# EAGLE board Project-TSC-PCB (EAGLE 9.7.0)
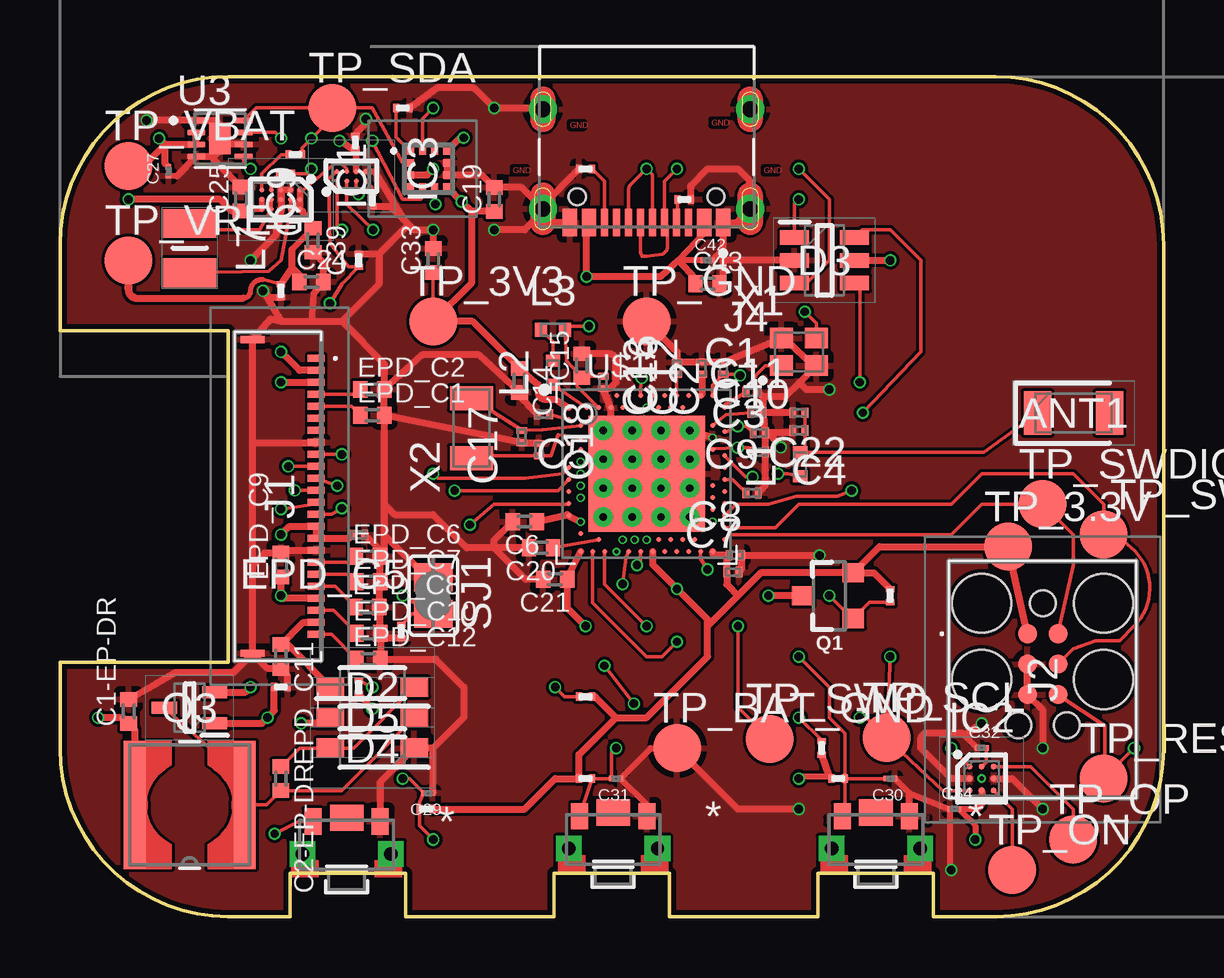
[diagram p0: board, top side]
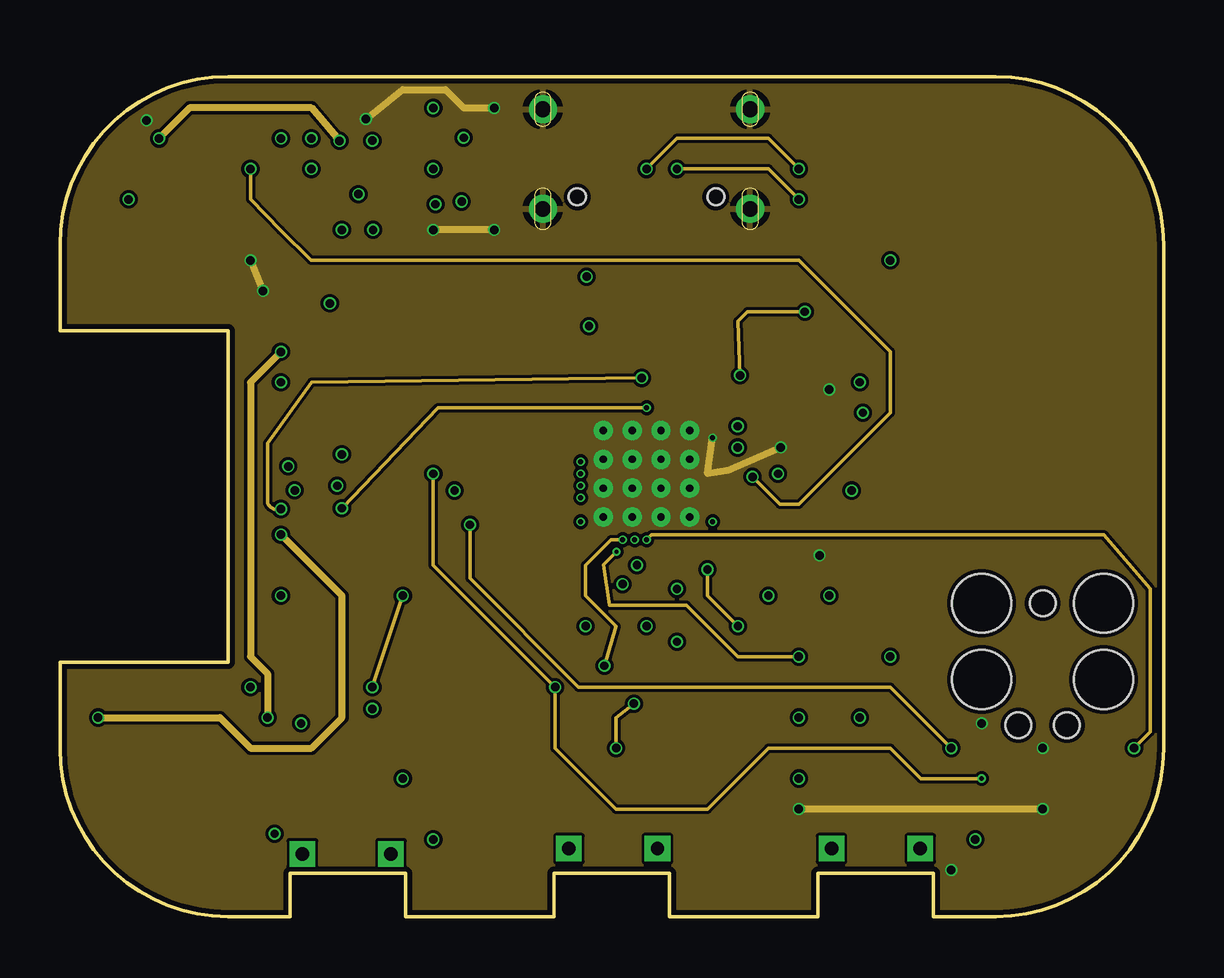
[diagram p1: board, inner layer Route2]
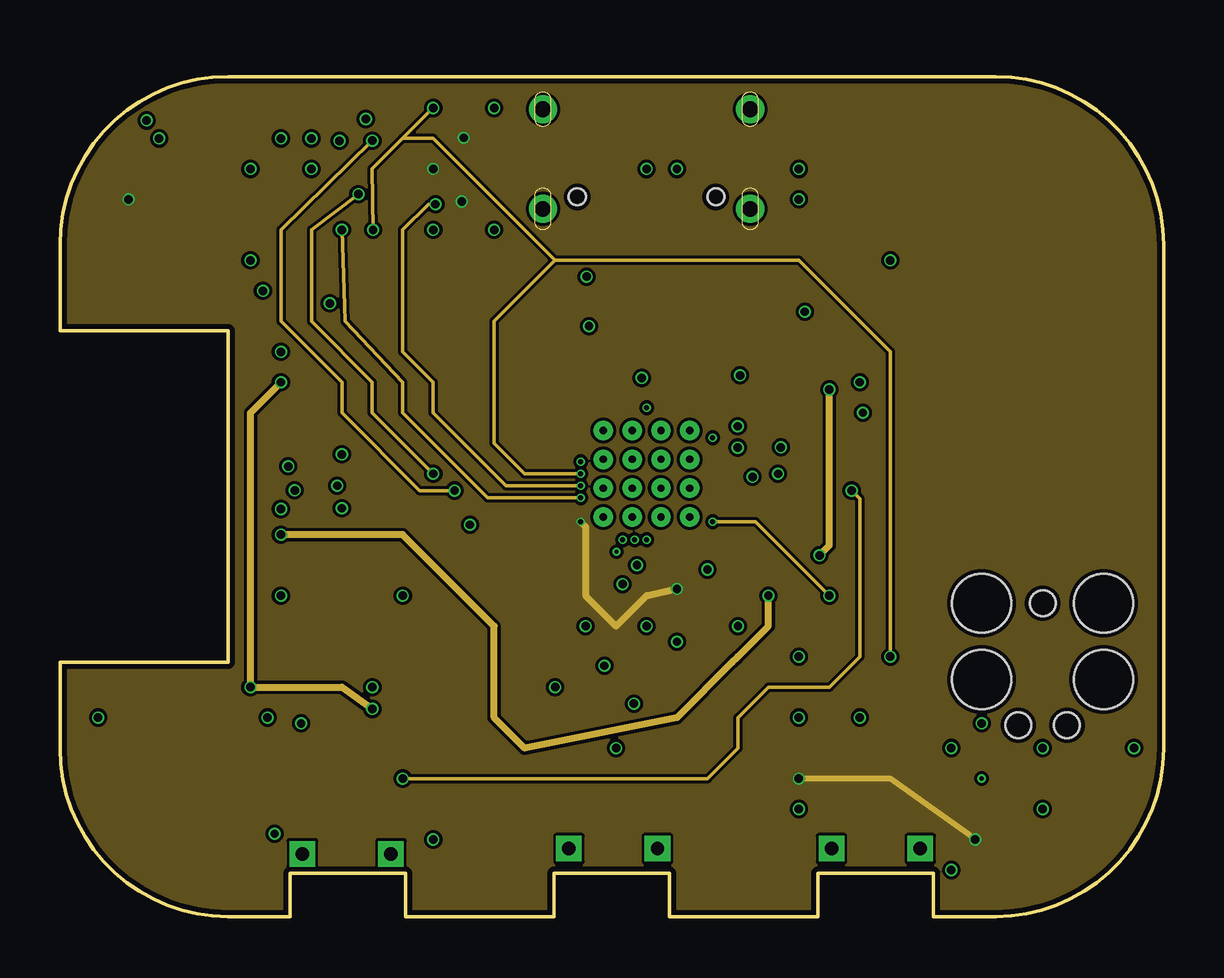
[diagram p2: board, inner layer Route15]
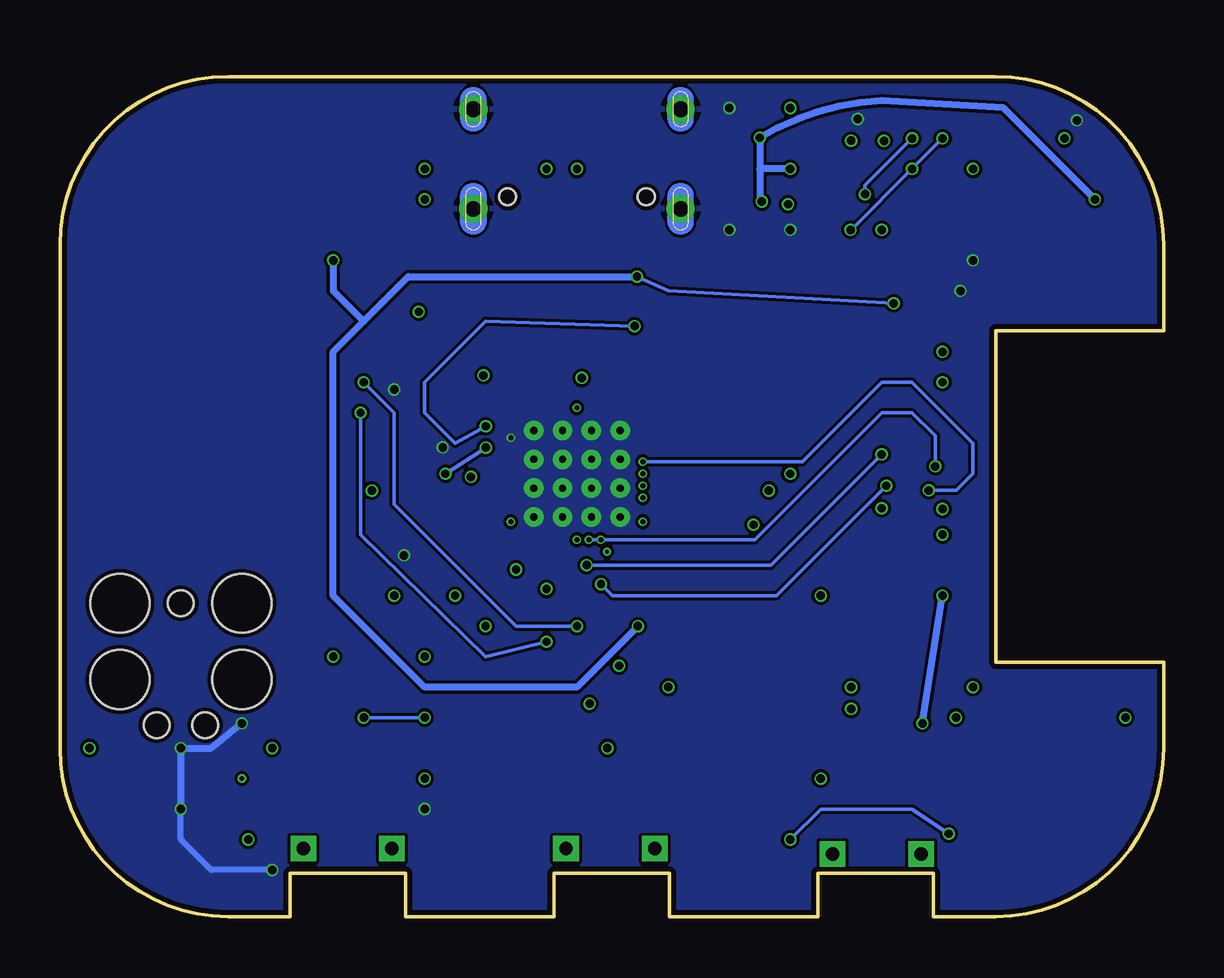
[diagram p3: board, bottom side, seen from below]

Size 46 x 35 mm. Coordinates in mm from the lower left corner, seen from the top.
Outline: 39,0 36.4,0 36.4,1.8 31.6,1.8 31.6,0 25.4,0 25.4,1.8 20.6,1.8 20.6,0 14.4,0 14.4,1.8 9.6,1.8 9.6,0 7,0 arc-90 0,7 0,10.6 7,10.6 7,24.4 0,24.4 0,28 arc-90 7,35 39,35 arc-90 46,28 46,7 arc-90 39,0
Copper layers (1+2*15+16): Top 0.035mm / dielectric 1.6mm / Route2 0.035mm / dielectric 0.15mm / Route15 0.035mm / dielectric 0.2mm / Bottom 0.035mm
Design rules "jlcpcb-2layers.dru *": minimum track width 5mil, minimum drill 0.3mm, track to track 5mil, track to pad 5mil, pad to pad 5mil, via to via 5mil, smd to smd 5mil, copper to edge 0.2mm, drill to drill 6mil, minimum pad ring 10mil, minimum via ring 3mil, stop-mask expansion 4mil, vias tented up to drill 0mil, thermal gap 10mil

## Footprints (pad centres in the part's own frame; a part is rotated, then mirrored left to right if it is on the bottom)
2450AT18B100E_ANTC3216X140N = smd 1.15 x 1.8: 1 -1.5,0; 2 1.5,0
NORDIC_NRF_3_RESC0201_L = smd 0.28 x 0.43: 1 -0.255,0; 2 0.255,0
PERFECT_0402_0402 = smd 0.6 x 0.7: 1 -0.5,0; 2 0.5,0
GRM011R60J152KE01L_1_0201 = smd 0.35 x 0.25: 1 0,0.275; 2 0,-0.275
GRM011R60J152KE01L_2_CAPC0201X13N = smd 0.22 x 0.23: 1 -0.185,0; 2 0.185,0
ESP32_C6_LIBRARY_5_SOD3716X135N = smd 1.15 x 0.8: 1 -1.75,0; 2 1.75,0
ESP32_C6_LIBRARY_3_SOT95P280X145-6N = smd 1.2 x 0.6: 1 -1.25,0.95; 2 -1.25,0; 3 -1.25,-0.95; 4 1.25,-0.95; 5 1.25,0; 6 1.25,0.95
BQ25180YBGR_BGA8C40P2X4_100X155X50 = smd 0.2 x 0.2: A1 -0.2,0.6; A2 0.2,0.6; B1 -0.2,0.2; B2 0.2,0.2; C1 -0.2,-0.2; C2 0.2,-0.2; D1 -0.2,-0.6; D2 0.2,-0.6
DRV2605YZFR_BGA9C50P3X3_144X144X62 = smd 0.25 x 0.25: A1 -0.5,0.5; A2 0,0.5; A3 0.5,0.5; B1 -0.5,0; B2 0,0; B3 0.5,0; C1 -0.5,-0.5; C2 0,-0.5; C3 0.5,-0.5
BMA423_BMA423 = smd 0.3 x 0.35: 1 -0.75,-0.775; 2 -0.25,-0.775; 3 0.25,-0.775; 4 0.75,-0.775; 7 0.75,0.775; 8 0.25,0.775; 9 -0.25,0.775; 10 -0.75,0.775 | smd 0.35 x 0.3: 5 0.775,-0.25; 6 0.775,0.25; 11 -0.775,0.25; 12 -0.775,-0.25
RT6160AWSC_BGA15C40P3X5_140X230X60 = smd 0.216 x 0.216: A1 -0.4,0.8; A2 0,0.8; A3 0.4,0.8; B1 -0.4,0.4; B2 0,0.4; B3 0.4,0.4; C1 -0.4,0; C2 0,0; C3 0.4,0; D1 -0.4,-0.4; D2 0,-0.4; D3 0.4,-0.4; E1 -0.4,-0.8; E2 0,-0.8; E3 0.4,-0.8
503480-2400_5034802400 = smd 0.3 x 0.7: 1 -5.75,1.525; 2 -5.25,1.525; 3 -4.75,1.525; 4 -4.25,1.525; 5 -3.75,1.525; 6 -3.25,1.525; 7 -2.75,1.525; 8 -2.25,1.525; 9 -1.75,1.525; 10 -1.25,1.525; 11 -0.75,1.525; 12 -0.25,1.525; 13 0.25,1.525; 14 0.75,1.525; 15 1.25,1.525; 16 1.75,1.525; 17 2.25,1.525; 18 2.75,1.525; 19 3.25,1.525; 20 3.75,1.525; 21 4.25,1.525; 22 4.75,1.525; 23 5.25,1.525; 24 5.75,1.525 | smd 0.3 x 1: MP1 -6.54,-1.125; MP2 6.54,-1.125
TC2030-IDC_TC2030IDC = smd 0.783 x 0.783: 1 -0.953,-0.635; 2 -0.953,0.635; 3 0.317,-0.635; 4 0.317,0.635; 5 1.588,-0.635; 6 1.588,0.635 | hole 2.451: -2.223,-2.54; -2.223,2.54; 0.952,-2.54; 0.952,2.54 | hole 1.067: -2.223,0; 2.857,-1.016; 2.857,1.016
KH-TYPE-C-16P_KINGHELM_KH-TYPE-C-16P = smd 0.6 x 1.15: A1_B12 -3.2,4.725; A4_B9 -2.4,4.725; A9_B4 2.4,4.725; A12_B1 3.2,4.725 | smd 0.3 x 1.15: A5 -1.25,4.725; A6 -0.25,4.725; A7 0.25,4.725; A8 1.25,4.725; B5 1.75,4.725; B6 0.75,4.725; B7 -0.75,4.725; B8 -1.75,4.725 | drill 0.65 pad 1.05: SH1 -4.32,0; SH2 4.32,0; SH3 -4.32,4.15; SH4 4.32,4.15 | hole 0.7: -2.89,3.65; 2.89,3.65
NORDIC_NRF_2_RESC0402_L = smd 0.5 x 0.6: 1 -0.5,0; 2 0.5,0
ESP32_C6_LIBRARY_2_IND_4828-WE-TPC_WRE = smd 0.9 x 5.3: 1 -2.286,0; 2 2.286,0
MLP2016SR47MT0S1_INDC2016X100N = smd 1.2 x 2.2: 1 -1.028,0; 2 1.028,0
ESP32_C6_LIBRARY_4_ESP32_C6_LIBRARY_4_ESP32_C6_LIBRARY_4_ESP32_C6_LIBRARY_4_ESP32_WROVER_SPARKFUN-DISCRETESEMI_SOT23-3 = smd 0.8 x 0.9: 1 -0.95,-1; 2 0.95,-1; 3 0,1.1
ESP32_C6_LIBRARY_6_SOT65P210X110-3N = smd 1.05 x 0.5: 1 -1.05,0.65; 2 -1.05,-0.65; 3 1.05,0
CPF0201D7K68C1_0201 = smd 0.35 x 0.25: 1 0,0.275; 2 0,-0.275
ESP32_C6_LIBRARY_7_JUMPER_SJ = smd 1.168 x 1.6: 1 -0.762,0; 2 0.762,0
2025-10-22_07-23-44_LIBRARY_SW_EVP-AKE31A_PAN = smd 0.711 x 1.092: 1 -1.4,-0.972; 2 1.4,-0.972 | drill 0.559 pad 0.914 square: 3 -1.848,0.381; 4 1.848,0.381 | smd 1.397 x 1.092: 5 0,-1.124
HECTOR_WATCH_1_TP20R = smd 2 x 2: TP 0,0
ESP32_C6_LIBRARY_SON50P200X200X80-9N = smd 0.76 x 0.27: 1 -0.985,0.75; 2 -0.985,0.25; 3 -0.985,-0.25; 4 -0.985,-0.75; 5 0.985,-0.75; 6 0.985,-0.25; 7 0.985,0.25; 8 0.985,0.75 | smd 0.9 x 1.3: 9 0,0
NORDIC_NRF_4_AQFN50P700X700X85_HS-74N = smd 4.85 x 4.85: P$74 0,0 | drill 0.3 pad 0.6: P$75 -1.8,1.8; P$76 -0.6,1.8; P$77 0.6,1.8; P$78 1.8,1.8; P$79 -1.8,0.6; P$80 -0.6,0.6; P$81 0.6,0.6; P$82 1.8,0.6; P$83 -1.8,-0.6; P$84 -0.6,-0.6; P$85 0.6,-0.6; P$86 1.8,-0.6; P$87 -1.8,-1.8; P$88 -0.6,-1.8; P$89 0.6,-1.8; P$90 1.8,-1.8 | smd 0.2 x 0.2: P$A8 -1.25,3.25; P$A10 -0.75,3.25; P$A12 -0.25,3.25; P$A14 0.25,3.25; P$A16 0.75,3.25; P$A18 1.25,3.25; P$A20 1.75,3.25; P$A22 2.25,3.25; P$A23 2.75,3.25; P$AA24 3.25,-2.25; P$AB2 -2.75,-2.5; P$AC5 -2,-2.75; P$AC9 -1,-2.75; P$AC11 -0.5,-2.75; P$AC13 0,-2.75; P$AC15 0.5,-2.75; P$AC17 1,-2.75; P$AC19 1.5,-2.75; P$AC21 2,-2.75; P$AC24 3.25,-2.75; P$AD2 -2.75,-3.25; P$AD4 -2.25,-3.25; P$AD6 -1.75,-3.25; P$AD8 -1.25,-3.25; P$AD10 -0.75,-3.25; P$AD12 -0.25,-3.25; P$AD14 0.25,-3.25; P$AD16 0.75,-3.25; P$AD18 1.25,-3.25; P$AD20 1.75,-3.25; P$AD22 2.25,-3.25; P$AD23 2.75,-3.25; P$B1 -3.25,2.75; P$B3 -2.5,2.75; P$B5 -2,2.75; P$B7 -1.5,2.75; P$B9 -1,2.75; P$B11 -0.5,2.75; P$B13 0,2.75; P$B15 0.5,2.75; P$B17 1,2.75; P$B19 1.5,2.75; P$B24 3.25,2.75; P$C1 -3.25,2.25; P$D2 -2.75,2; P$D23 2.75,2; P$E24 3.25,1.75; P$F2 -2.75,1.5; P$F23 2.75,1.5; P$G1 -3.25,1.25; P$H2 -2.75,1; P$H23 2.75,1; P$J1 -3.25,0.75; P$J24 3.25,0.75; P$K2 -2.75,0.5; P$L1 -3.25,0.25; P$L24 3.25,0.25; P$M2 -2.75,0; P$N1 -3.25,-0.25; P$N24 3.25,-0.25; P$P2 -2.75,-0.5; P$P23 2.75,-0.5; P$R1 -3.25,-0.75; P$R24 3.25,-0.75; P$T2 -2.75,-1; P$T23 2.75,-1; P$U1 -3.25,-1.25; P$U24 3.25,-1.25; P$V23 2.75,-1.5; P$W1 -3.25,-1.75; P$W24 3.25,-1.75; P$Y2 -2.75,-2; P$Y23 2.75,-2
NORDIC_NRF_BT-XTAL_2016_N = smd 0.95 x 0.85: 1 -0.725,-0.575; 2 0.725,-0.575; 3 0.725,0.575; 4 -0.725,0.575
NORDIC_NRF_1_XTAL_3215_N = smd 1 x 1.8: 1 -1.25,0; 2 1.25,0

## Placement (x,y rotation side)
ANT1  2450AT18B100E_2450AT18B100E  [2450AT18B100E_ANTC3216X140N]  42.25,20.98 0 top
C1  12pF  [NORDIC_NRF_3_RESC0201_L]  28.85,21.85 0 top
C1-EP-DR  10uF  [PERFECT_0402_0402]  2.86,8.55 90 top
C2  12pF  [NORDIC_NRF_3_RESC0201_L]  27.65,22.85 90 top
C2-EP-DR  4.7uF/25V  [PERFECT_0402_0402]  9.21,5.75 270 top
C3  1pF  [NORDIC_NRF_3_RESC0201_L]  29.15,19.35 0 top
C4  1pF  [NORDIC_NRF_3_RESC0201_L]  30.8,20.25 180 top
C5  100nF  [NORDIC_NRF_3_RESC0201_L]  20.15,20.93 180 top
C6  4.7µF  [PERFECT_0402_0402]  19.37,16.45 180 top
C7  100nF  [NORDIC_NRF_3_RESC0201_L]  28.05,14.35 0 top
C8  100nF  [NORDIC_NRF_3_RESC0201_L]  28.15,15.05 0 top
C9  820pF  [NORDIC_NRF_3_RESC0201_L]  28.85,17.65 0 top
C10  N.C.  [NORDIC_NRF_3_RESC0201_L]  29.15,20.15 0 top
C11  100pF  [NORDIC_NRF_3_RESC0201_L]  29.05,21 0 top
C12  100nF  [NORDIC_NRF_3_RESC0201_L]  26.75,22.85 90 top
C13  N.C.  [NORDIC_NRF_3_RESC0201_L]  25.72,22.85 90 top
C14  4.7µF  [PERFECT_0402_0402]  19.15,22.34 270 top
C15  1.0µF  [PERFECT_0402_0402]  21.75,22.95 90 top
C16  47nF  [NORDIC_NRF_3_RESC0201_L]  22.64,22.26 270 top
C17  12pF  [NORDIC_NRF_3_RESC0201_L]  19.25,20 90 top
C18  12pF  [NORDIC_NRF_3_RESC0201_L]  19.97,19.45 270 top
C19  100nF  [PERFECT_0402_0402]  18.1,29.88 90 top
C20  4.7µF  [PERFECT_0402_0402]  20.05,15.36 180 top
C21  4.7µF  [PERFECT_0402_0402]  20.64,14.05 180 top
C22  N.C.  [NORDIC_NRF_3_RESC0201_L]  30.8,20.99 180 top
C23  0.1uF  [GRM011R60J152KE01L_1_0201]  9.21,26.07 180 top
C24  10uF  [PERFECT_0402_0402]  10.48,26.44 0 top
C25  22uF  [PERFECT_0402_0402]  7.55,29.89 90 top
C27  0.1uF  [GRM011R60J152KE01L_2_CAPC0201X13N]  4.53,31.05 90 top
C29  1uF  [GRM011R60J152KE01L_2_CAPC0201X13N]  15.35,5.15 180 top
C30  1uF  [GRM011R60J152KE01L_2_CAPC0201X13N]  34.61,5.75 180 top
C31  1uF  [GRM011R60J152KE01L_2_CAPC0201X13N]  23.18,5.75 180 top
C32  1uF  [GRM011R60J152KE01L_2_CAPC0201X13N]  38.42,7.02 0 top
C33  22uF  [PERFECT_0402_0402]  15.56,27.34 90 top
C34  0.1uF  [GRM011R60J152KE01L_2_CAPC0201X13N]  37.28,4.48 0 top
C37  1uF  [GRM011R60J152KE01L_1_0201]  12.32,32.25 0 top
C38  1uF  [GRM011R60J152KE01L_1_0201]  12.45,27.34 0 top
C39  10uF  [PERFECT_0402_0402]  10.55,28.18 270 top
C42  0.1uF  [GRM011R60J152KE01L_2_CAPC0201X13N]  26.99,27.34 0 top
C43  4.7uF  [PERFECT_0402_0402]  26.99,26.37 0 top
D2  MBR0530  [ESP32_C6_LIBRARY_5_SOD3716X135N]  13.02,9.56 180 top
D3  ESP32_C6_LIBRARY_3_USBLC6-2SC6Y  [ESP32_C6_LIBRARY_3_SOT95P280X145-6N]  31.87,27.34 0 top
D4  MBR0530  [ESP32_C6_LIBRARY_5_SOD3716X135N]  13.02,7.02 180 top
D5  MBR0530  [ESP32_C6_LIBRARY_5_SOD3716X135N]  13.02,8.29 0 top
EPD_C1  1uF/50V  [PERFECT_0402_0402]  13.02,20.89 0 top
EPD_C2  1uF/50V  [PERFECT_0402_0402]  13.02,21.96 0 top
EPD_C5  0.1uF/50V  [NORDIC_NRF_3_RESC0201_L]  12.45,15.91 180 top
EPD_C6  1uF/50V  [PERFECT_0402_0402]  12.84,15.01 0 top
EPD_C7  1uF/50V  [PERFECT_0402_0402]  12.85,13.95 0 top
EPD_C8  1uF/50V  [PERFECT_0402_0402]  12.82,12.89 0 top
EPD_C9  1uF/50V  [PERFECT_0402_0402]  9.21,14.64 90 top
EPD_C10  1uF/50V  [PERFECT_0402_0402]  12.86,11.8 0 top
EPD_C11  1uF/50V  [PERFECT_0402_0402]  9.21,10.83 270 top
EPD_C12  1uF/50V  [PERFECT_0402_0402]  12.85,10.73 0 top
IC1  BQ25180YBGR_BQ25180YBGR  [BQ25180YBGR_BGA8C40P2X4_100X155X50]  12.15,30.85 90 top
IC2  DRV2605YZFR_DRV2605YZFR  [DRV2605YZFR_BGA9C50P3X3_144X144X62]  38.42,5.75 0 top
IC3  BMA423_BMA423  [BMA423_BMA423]  15.36,31.15 270 top
IC9  RT6160AWSC_RT6160AWSC  [RT6160AWSC_BGA15C40P3X5_140X230X60]  9.21,29.88 270 top
J1  503480-2400_503480-2400  [503480-2400_5034802400]  9.15,17.51 270 top
J2  TC2030-IDC_TC2030-IDC  [TC2030-IDC_TC2030IDC]  40.96,10.83 270 top
J4  KH-TYPE-C-16P_KH-TYPE-C-16P  [KH-TYPE-C-16P_KINGHELM_KH-TYPE-C-16P]  24.45,33.64 180 top
L1  3.9nH  [NORDIC_NRF_2_RESC0402_L]  30.85,18.85 90 top
L2  3.9nH  [NORDIC_NRF_2_RESC0402_L]  20.55,22.65 90 top
L3  3.9nH  [NORDIC_NRF_2_RESC0402_L]  20.55,24.45 0 top
L5  68uH  [ESP32_C6_LIBRARY_2_IND_4828-WE-TPC_WRE]  5.4,4.65 180 top
L7  MLP2016SR47MT0S1_FTC252012SR47MBCA  [MLP2016SR47MT0S1_INDC2016X100N]  5.4,27.85 90 top
Q1  20V/4.2A/52mΩ/1.4W  [ESP32_C6_LIBRARY_4_ESP32_C6_LIBRARY_4_ESP32_C6_LIBRARY_4_ESP32_C6_LIBRARY_4_ESP32_WROVER_SPARKFUN-DISCRETESEMI_SOT23-3]  32.07,13.37 90 top
Q3  ESP32_C6_LIBRARY_6_SI1308EDL-T1-GE3  [ESP32_C6_LIBRARY_6_SOT65P210X110-3N]  5.4,8.7 180 top
R1_EP_DR  0.47  [CPF0201D7K68C1_0201]  12.45,9.56 0 top
R1_USB  5K1  [CPF0201D7K68C1_0201]  26.02,29.88 270 top
R2  0  [CPF0201D7K68C1_0201]  9.81,31.75 270 top
R2_EP_DR  10K  [CPF0201D7K68C1_0201]  9.21,9.56 270 top
R2_USB  5K1  [CPF0201D7K68C1_0201]  21.91,31.15 270 top
R3  0  [CPF0201D7K68C1_0201]  14.29,33.69 270 top
R4  0  [CPF0201D7K68C1_0201]  9.41,30.95 270 top
R5  10K  [CPF0201D7K68C1_0201]  32.44,5.75 270 top
R7  10K  [CPF0201D7K68C1_0201]  15.26,4.48 90 top
R8  10K  [CPF0201D7K68C1_0201]  21.91,5.75 270 top
R9  10K  [CPF0201D7K68C1_0201]  13.02,29.88 180 top
R17  3K3  [CPF0201D7K68C1_0201]  31.75,7.02 180 top
R18  3K3  [CPF0201D7K68C1_0201]  21.91,9.16 270 top
R_PWR_EPD  10K  [CPF0201D7K68C1_0201]  34.61,13.37 180 top
R_TYPE_SEL  2.2  [CPF0201D7K68C1_0201]  14.23,11.88 180 top
SJ1  0  [ESP32_C6_LIBRARY_7_JUMPER_SJ]  15.56,13.37 270 top
SW_DN  2025-10-22_07-23-44_LIBRARY_EVP-AKE31ASW_EVP-AKE31A_PAN  [2025-10-22_07-23-44_LIBRARY_SW_EVP-AKE31A_PAN]  11.95,2.99 180 top
SW_ENT  2025-10-22_07-23-44_LIBRARY_EVP-AKE31ASW_EVP-AKE31A_PAN  [2025-10-22_07-23-44_LIBRARY_SW_EVP-AKE31A_PAN]  23.06,3.21 180 top
SW_UP  2025-10-22_07-23-44_LIBRARY_EVP-AKE31ASW_EVP-AKE31A_PAN  [2025-10-22_07-23-44_LIBRARY_SW_EVP-AKE31A_PAN]  34.01,3.21 180 top
TP_3.3V  HECTOR_WATCH_1_TPTP20R  [HECTOR_WATCH_1_TP20R]  39.52,15.41 0 top
TP_3V3  HECTOR_WATCH_1_TPTP20R  [HECTOR_WATCH_1_TP20R]  15.56,24.8 0 top
TP_BAT_GND  HECTOR_WATCH_1_TPTP20R  [HECTOR_WATCH_1_TP20R]  25.72,7.02 0 top
TP_GND  HECTOR_WATCH_1_TPTP20R  [HECTOR_WATCH_1_TP20R]  24.45,24.8 0 top
TP_ON  HECTOR_WATCH_1_TPTP20R  [HECTOR_WATCH_1_TP20R]  39.69,1.94 0 top
TP_OP  HECTOR_WATCH_1_TPTP20R  [HECTOR_WATCH_1_TP20R]  42.23,3.21 0 top
TP_RESET  HECTOR_WATCH_1_TPTP20R  [HECTOR_WATCH_1_TP20R]  43.5,5.75 0 top
TP_SCL  HECTOR_WATCH_1_TPTP20R  [HECTOR_WATCH_1_TP20R]  34.45,7.45 0 top
TP_SDA  HECTOR_WATCH_1_TPTP20R  [HECTOR_WATCH_1_TP20R]  11.35,33.69 0 top
TP_SWDCLK  HECTOR_WATCH_1_TPTP20R  [HECTOR_WATCH_1_TP20R]  43.5,15.91 0 top
TP_SWDIO  HECTOR_WATCH_1_TPTP20R  [HECTOR_WATCH_1_TP20R]  40.96,17.18 0 top
TP_SWO  HECTOR_WATCH_1_TPTP20R  [HECTOR_WATCH_1_TP20R]  29.59,7.4 0 top
TP_VBAT  HECTOR_WATCH_1_TPTP20R  [HECTOR_WATCH_1_TP20R]  2.86,31.28 0 top
TP_VREG  HECTOR_WATCH_1_TPTP20R  [HECTOR_WATCH_1_TP20R]  2.86,27.34 0 top
U3  ESP32_C6_LIBRARY_MAX17048G+T10  [ESP32_C6_LIBRARY_SON50P200X200X80-9N]  6.67,32.42 0 top
U$1  NORDIC_NRF_4_NRF52840_QF  [NORDIC_NRF_4_AQFN50P700X700X85_HS-74N]  24.45,18.45 0 top
X1  32MHz  [NORDIC_NRF_BT-XTAL_2016_N]  30.8,23.53 0 top
X2  32.768kHz  [NORDIC_NRF_1_XTAL_3215_N]  17.15,20.35 90 top

## Library data of the parts
ANT1 = InkTime_v5; ARROW_PART_NUMBER: 2450AT18B100E; ARROW_PRICE-STOCK: https://www.arrow.com/en/products/2450at18b100e/johanson-dielectrics?utm_currency=USD&region=nac; DESCRIPTION: Antennas 2.45GHz ANTENNA; HEIGHT: 1.4mm; MANUFACTURER_NAME: JOHANSON TECHNOLOGY; MANUFACTURER_PART_NUMBER: 2450AT18B100E; MOUSER_PART_NUMBER: 609-2450AT18B100E; MOUSER_PRICE-STOCK: https://www.mouser.co.uk/ProductDetail/Johanson-Technology/2450AT18B100E?qs=yCnrNFeXz%252Bh5MFsFIXGZGA%3D%3D
C1 C1-EP-DR C2 C2-EP-DR C3-C25 C33 C37-C39 C43 EPD_C1 EPD_C2 EPD_C5-EPD_C12 L1-L3 R1_EP_DR R1_USB R2 R2_EP_DR R2_USB R3-R5 R7-R9 R17 R18 R_PWR_EPD R_TYPE_SEL SJ1 TP_3.3V TP_3V3 TP_BAT_GND TP_GND TP_ON TP_OP TP_RESET TP_SCL TP_SDA TP_SWDCLK TP_SWDIO TP_SWO TP_VBAT TP_VREG U$1 X1 X2 = InkTime_v5
C27 C29-C32 C34 C42 = InkTime_v5; AVAILABILITY: In Stock; CHECK_PRICES: https://www.snapeda.com/parts/GRM011R60J152KE01L/Murata/view-part/?ref=eda; DESCRIPTION: SMD Capacitor X5R(EIA) with Capacitance: 1500pF Tol. 10%. Rated Voltage: 6.3Vdc; MF: Murata; MP: GRM011R60J152KE01L; PACKAGE: 0201 Murata; PRICE: None; SNAPEDA_LINK: https://www.snapeda.com/parts/GRM011R60J152KE01L/Murata/view-part/?ref=snap
D2 D4 D5 = InkTime_v5; AVAILABILITY: In Stock; CHECK_PRICES: https://www.snapeda.com/parts/MBR0530/Onsemi/view-part/?ref=eda; DESCRIPTION: Diode Schottky 30 V 500mA Surface Mount SOD-123; MF: ON Semiconductor; MP: MBR0530; PACKAGE: SOD-123-2 ON Semiconductor; PRICE: None; PURCHASE-URL: https://www.snapeda.com/api/url_track_click_mouser/?unipart_id=179458&manufacturer=ON Semiconductor&part_name=MBR0530&search_term=None; SNAPEDA_LINK: https://www.snapeda.com/parts/MBR0530/Onsemi/view-part/?ref=snap
D3 = InkTime_v5; AVAILABILITY: In Stock; CHECK_PRICES: https://www.snapeda.com/parts/USBLC6-2SC6Y/STMicroelectronics/view-part/?ref=eda; DESCRIPTION: 17V Clamp 5A (8/20µs) Ipp Tvs Diode Surface Mount SOT-23-6; MF: STMicroelectronics; MP: USBLC6-2SC6Y; PACKAGE: SOT-23-6 STMicroelectronics; PRICE: None; SNAPEDA_LINK: https://www.snapeda.com/parts/USBLC6-2SC6Y/STMicroelectronics/view-part/?ref=snap
IC1 = InkTime_v5; ARROW_PART_NUMBER: BQ25180YBGR; ARROW_PRICE-STOCK: https://www.arrow.com/en/products/bq25180ybgr/texas-instruments?utm_currency=USD&region=nac; DESCRIPTION: Charger IC Lithium Ion/Polymer, Lithium Iron Phosphate 8-DSBGA (1.6x1.1); HEIGHT: 0.5mm; MANUFACTURER_NAME: Texas Instruments; MANUFACTURER_PART_NUMBER: BQ25180YBGR; MOUSER_PART_NUMBER: 595-BQ25180YBGR; MOUSER_PRICE-STOCK: https://www.mouser.co.uk/ProductDetail/Texas-Instruments/BQ25180YBGR?qs=doiCPypUmgEWjAK%252BJAX6Tw%3D%3D
IC2 = InkTime_v5; ARROW_PART_NUMBER: DRV2605YZFR; ARROW_PRICE-STOCK: https://www.arrow.com/en/products/drv2605yzfr/texas-instruments?region=nac; DESCRIPTION: Haptic Driver for ERM/LRA with Built-In Library and Smart Loop Architecture; HEIGHT: 0.625mm; MANUFACTURER_NAME: Texas Instruments; MANUFACTURER_PART_NUMBER: DRV2605YZFR
IC3 = InkTime_v5; ARROW_PART_NUMBER: BMA423; ARROW_PRICE-STOCK: https://www.arrow.com/en/products/bma423/bosch; DESCRIPTION: Accelerometers Triaxial low-g 12bit Acceleration Sensor; HEIGHT: 1mm; MANUFACTURER_NAME: BOSCH; MANUFACTURER_PART_NUMBER: BMA423; MOUSER_PART_NUMBER: 262-BMA423; MOUSER_PRICE-STOCK: https://www.mouser.co.uk/ProductDetail/Bosch-Sensortec/BMA423?qs=HXFqYaX1Q2xC%252BSgeGoX3mg%3D%3D
IC9 = InkTime_v5; DESCRIPTION: Buck-Boost Regulator Positive Output Step-Up/Step-Down I2C DC-DC Controller IC 15-WL-CSP (BSC) (1.4x2.3); HEIGHT: 0.6mm; MANUFACTURER_NAME: RICHTEK; MANUFACTURER_PART_NUMBER: RT6160AWSC; MOUSER_PART_NUMBER: 835-RT6160AWSC; MOUSER_PRICE-STOCK: https://www.mouser.co.uk/ProductDetail/Richtek/RT6160AWSC?qs=amGC7iS6iy%2FLd9PSoixZXQ%3D%3D
J1 = InkTime_v5; DESCRIPTION: FFC & FPC Connectors 0.5mm FPC RA SMT Dual Contact 24Ckt; HEIGHT: 1.87mm; MANUFACTURER_NAME: Molex; MANUFACTURER_PART_NUMBER: 503480-2400; MOUSER_PART_NUMBER: 538-503480-2400; MOUSER_PRICE-STOCK: https://www.mouser.co.uk/ProductDetail/Molex/503480-2400?qs=OAhjpuo3Vu7efIoxFh9AOw%3D%3D
J2 = InkTime_v5; DESCRIPTION: CABLE ADAPTER 6 POS; HEIGHT: 19mm; MANUFACTURER_NAME: Tag Connect; MANUFACTURER_PART_NUMBER: TC2030-IDC
J4 = InkTime_v5; AVAILABILITY: Not in stock; CHECK_PRICES: https://www.snapeda.com/parts/KH-TYPE-C-16P/Kinghelm/view-part/?ref=eda; MF: kinghelm; MP: KH-TYPE-C-16P; PACKAGE: None; PRICE: None; SNAPEDA_LINK: https://www.snapeda.com/parts/KH-TYPE-C-16P/Kinghelm/view-part/?ref=snap
L5 = InkTime_v5; COPYRIGHT: Copyright (C) 2024 Ultra Librarian. All rights reserved.; MANUFACTURER_PART_NUMBER: 744043680; MFR_NAME: Wurth Electronics
L7 = InkTime_v5; DESCRIPTION: SMD / SMT Inductors (Coils), L=0.47?H, L x W x T :; HEIGHT: 1mm; JLCPCB: https://jlcpcb.com/partdetail/6763488-FTC252012SR47MBCA/C5832368; MANUFACTURER_NAME: TDK; MANUFACTURER_PART_NUMBER: FTC252012SR47MBCA
Q1 = InkTime_v5; PROD_ID: TRAN-14388
Q3 = InkTime_v5; AVAILABILITY: In Stock; CHECK_PRICES: https://www.snapeda.com/parts/SI1308EDL-T1-GE3/Vishay+Siliconix/view-part/?ref=eda; DESCRIPTION: Si1308EDL-T1-GE3 N-channel MOSFET Transistor, 1.5 A, 30 V, 3-Pin SC-70 | Siliconix / Vishay SI1308EDL-T1-GE3; MF: Vishay Siliconix; MP: SI1308EDL-T1-GE3; PACKAGE: SOT-323 Vishay Semiconductor; PRICE: None; PURCHASE-URL: https://www.snapeda.com/api/url_track_click_mouser/?unipart_id=274603&manufacturer=Vishay Siliconix&part_name=SI1308EDL-T1-GE3&search_term=None; SNAPEDA_LINK: https://www.snapeda.com/parts/SI1308EDL-T1-GE3/Vishay+Siliconix/view-part/?ref=snap
SW_DN SW_ENT SW_UP = InkTime_v5; COPYRIGHT: Copyright (C) 2025 Ultra Librarian. All rights reserved.; DIGI-KEY_PART_NUMBER_1: P123437TR-ND; DIGI-KEY_PART_NUMBER_2: P123437CT-ND; DIGI-KEY_PART_NUMBER_3: P123437DKR-ND; MANUFACTURER_NAME: Panasonic; MANUFACTURER_PART_NUMBER: EVP-AKE31A
U3 = InkTime_v5; AVAILABILITY: In Stock; CHECK_PRICES: https://www.snapeda.com/parts/MAX17048G+T10/Analog+Devices/view-part/?ref=eda; DESCRIPTION: 3µA 1-Cell/2-Cell Fuel Gauge with ModelGauge; MF: Analog Devices; MP: MAX17048G+T10; PACKAGE: TDFN-8 Maxim; PRICE: None; PURCHASE-URL: https://www.snapeda.com/api/url_track_click_mouser/?unipart_id=329239&manufacturer=Analog Devices&part_name=MAX17048G+T10&search_term=None; SNAPEDA_LINK: https://www.snapeda.com/parts/MAX17048G+T10/Analog+Devices/view-part/?ref=snap

## Nets
3V3: C6.1 C7.1 C8.1 C14.1 C19.1 C25.1 C33.1 C34.2 IC2.C2 IC3.3 IC3.7 IC3.10 IC9.E2 IC9.E3 J2.1 Q1.2 R5.2 R7.2 R8.2 R17.1 R18.1 R_PWR_EPD.2 TP_3.3V.TP TP_3V3.TP U$1.P$AD14 U$1.P$AD23 U$1.P$B1 U$1.P$W1 U$1.P$Y2
3V3/2.4A: C12.1 U$1.P$A22
ALERT: U3.5 U$1.P$J24
D+: D3.4 U$1.P$AD6
D-: D3.6 U$1.P$AD4
DEC1: C5.1 U$1.P$C1
DEC3: C11.1 U$1.P$D23
DEC4_6: C10.1 C15.1 C16.1 L3.2 U$1.P$B5 U$1.P$E24
DN: D3.1 J4.A7 J4.B7
DP: D3.3 J4.A6 J4.B6
EPD_3V3: C1-EP-DR.1 EPD_C5.2 J1.15 J1.16 L5.2 Q1.3
EPD_BUSY: J1.9 U$1.P$AD12
EPD_CS: J1.12 U$1.P$K2
EPD_DC: J1.11 U$1.P$AD10
EPD_RST: J1.10 U$1.P$AC11
GDR: J1.2 Q3.1 R2_EP_DR.2
GND: C1-EP-DR.2 C1.2 C2.2 C3.2 C4.2 C5.2 C6.2 C7.2 C8.2 C9.2 C10.2 C11.2 C12.2 C13.2 C14.2 C15.2 C16.2 C17.1 C18.1 C19.2 C20.2 C21.2 C22.2 C23.1 C24.2 C25.2 C27.1 C29.1 C30.1 C31.1 C32.1 C33.2 C34.1 C37.1 C38.1 C39.2 C42.2 C43.2 D3.2 D4.1 EPD_C1.2 EPD_C2.2 EPD_C5.1 EPD_C6.2 EPD_C7.2 EPD_C8.2 EPD_C9.2 EPD_C10.2 EPD_C11.2 EPD_C12.2 IC1.D2 IC2.B1 IC2.B3 IC3.8 IC3.9 IC9.B1 IC9.C1 IC9.C2 IC9.C3 J1.8 J1.17 J1.MP1 J1.MP2 J2.3 J2.5 J4.A1_B12 J4.A12_B1 J4.SH1 J4.SH2 J4.SH3 J4.SH4 R1_USB.1 R2_EP_DR.1 R2_USB.2 R3.1 R9.1 R_TYPE_SEL.1 SJ1.1 SW_DN.1 SW_ENT.1 SW_UP.1 TP_BAT_GND.TP TP_GND.TP U3.1 U3.4 U3.6 U3.9 U$1.P$74 U$1.P$75 U$1.P$76 U$1.P$77 U$1.P$78 U$1.P$79 U$1.P$80 U$1.P$81 U$1.P$82 U$1.P$83 U$1.P$84 U$1.P$85 U$1.P$86 U$1.P$87 U$1.P$88 U$1.P$89 U$1.P$90 U$1.P$B7 U$1.P$F23 X1.2 X1.4
HAPTIC_EN: IC2.A1 U$1.P$U1
IMU_INT1: IC3.5 U$1.P$N1
IMU_INT2: IC3.6 U$1.P$P2
LX1: IC9.B2 IC9.B3 L7.1
LX2: IC9.D2 IC9.D3 L7.2
MOSI: J1.14 U$1.P$B13
N$1: IC1.D1 R9.2
N$2: C9.1 U$1.P$N24
N$3: IC9.D1 R4.2
N$4: IC9.E1 R2.2
N$5: IC3.1 R3.2
N$6: C2-EP-DR.1 D2.1 D4.2
N$7: C3.1 L1.1 U$1.P$H23
N$9: C1.1 U$1.P$B24 X1.1
N$10: C2.1 U$1.P$A23 X1.3
N$11: C2-EP-DR.2 D5.2 L5.1 Q3.3
N$12: J4.A5 R1_USB.2
N$13: C13.1 U$1.P$A18
N$14: L2.2 L3.1
N$15: L2.1 U$1.P$B3
N$16: J4.B5 R2_USB.1
N$17: C17.2 U$1.P$D2 X2.2
N$18: C18.2 U$1.P$F2 X2.1
N$19: C20.1 U$1.P$AC5
N$20: EPD_C2.1 J1.4
N$21: R1_EP_DR.1 R_TYPE_SEL.2 SJ1.2
N$22: C32.2 IC2.A2
N$23: EPD_C1.1 J1.5
N$24: EPD_C6.1 J1.18
N$25: EPD_C7.1 J1.19
N$26: EPD_C8.1 J1.20
N$28: EPD_C10.1 J1.22
N$30: EPD_C12.1 J1.24
OUT+: IC2.A3 TP_OP.TP
OUT-: IC2.C3 TP_ON.TP
P0.04: U$1.P$J1
P0.09: U$1.P$L24
P0.13: C30.2 R5.1 SW_UP.2 U$1.P$AD8
P0.14: C31.2 R8.1 SW_ENT.2 U$1.P$AC9
P0.19: U$1.P$AC15
P0.20: U$1.P$AD16
P0.21: U$1.P$AC17
P0.22: U$1.P$AD18
P0.23: U$1.P$AC19
P0.24: U$1.P$AD20
P0.25: U$1.P$AC21
P0.26: U$1.P$G1
P0.27: U$1.P$H2
P0.28: U$1.P$B11
P0.29: U$1.P$A10
P0.30: U$1.P$B9
P0.31: U$1.P$A8
P1.01: Q1.1 R_PWR_EPD.1 U$1.P$Y23
P1.02: C29.2 R7.1 SW_DN.2 U$1.P$W24
P1.03: U$1.P$V23
P1.04: U$1.P$U24
P1.05: U$1.P$T23
P1.06: U$1.P$R24
P1.07: U$1.P$P23
P1.09: U$1.P$R1
P1.10: U$1.P$A20
P1.11: U$1.P$B19
P1.12: U$1.P$B17
P1.13: U$1.P$A16
P1.14: U$1.P$B15
P1.15: U$1.P$A14
PMIC_INT: IC1.A1 U$1.P$T2
PREVGH: D5.1 EPD_C9.1 J1.21
PREVGL: D2.2 EPD_C11.1 J1.23
RESE: J1.3 Q3.2 R1_EP_DR.2
RESET: J2.6 TP_RESET.TP U$1.P$AC13
RF: ANT1.1 C4.1 C22.1 L1.2
SCK: J1.13 U$1.P$A12
SCL: IC1.B1 IC2.C1 IC3.12 R4.1 R17.2 TP_SCL.TP U3.7 U$1.P$M2
SDA: IC1.C1 IC2.B2 IC3.2 R2.1 R18.2 TP_SDA.TP U3.8 U$1.P$L1
SWDCLK: J2.4 TP_SWDCLK.TP U$1.P$AA24
SWDIO: J2.2 TP_SWDIO.TP U$1.P$AC24
SWO: TP_SWO.TP U$1.P$AD22
VBAT: C27.2 C37.2 IC1.C2 TP_VBAT.TP U3.2 U3.3
VBUS: C21.1 C38.2 C42.1 C43.1 D3.5 IC1.A2 J4.A4_B9 J4.A9_B4 U$1.P$AD2
VREG: C23.2 C24.1 C39.1 IC1.B2 IC9.A1 IC9.A2 IC9.A3 TP_VREG.TP

## Tracks (layer width: path | path; a pad name or v marks a point on that pad's centre or on a via)
3V3  (via drill 0.2, 0.35)
  Top 0.15: C33.1 TP_3V3.TP
  Top 0.236: IC9.E3 7.64,29.48
  Top 0.24: 38.12,4.48 C34.2 38.15,3.79 v38.15,3.21 | v30.8,5.75 30.89,5.84 32.07,5.84
  Top 0.26: IC9.E2 IC9.E3
  Top 0.3: U$1.P$Y2 U$1.P$W1 21.15,16.75 C6.1 | J2.1 TP_3.3V.TP 34.16,15.41 Q1.2 | U$1.P$B1 20.89,21.39 20.64,21.55 20.23,21.55 arc-90 19.93,21.85 19.93,22.16 19.56,22.48 C14.1 17.19,24.8 TP_3V3.TP 17.16,26.39 17.16,29.38 | IC3.7 v16.74,29.79 17.16,29.38 | C19.1 17.16,29.38 | IC3.3 15.31,30.9 v15.56,31.15 | IC3.10 16.66,32.42 v16.83,32.45 | 7.64,29.48 C25.1 7.16,29.39 6.67,29.88 v2.86,29.88 | Q1.2 33.94,14.32 R_PWR_EPD.2 | Q1.2 29.21,14.32 28.26,13.37 | IC2.C2 38.42,4.78 arc-90 38.12,4.48 | R5.2 32.07,5.84 R17.1 | R7.2 19.37,4.48 20.64,5.75 R8.2 21.63,6.74 23.18,8.29 | 23.18,8.29 24.45,8.29 26.99,10.83 26.99,12.1 | 26.99,12.1 26.99,12.38 v25.72,13.65 24.7,14.67 U$1.P$AD14 | 26.99,12.1 28.26,13.37 | 23.18,8.29 22.31,9.16 R18.1 | U$1.P$AD23 arc90 27.35,15.05 C8.1 27.79,14.95 C7.1 27.79,13.83 28.26,13.37
  Route15 0.24: v38.15,3.21 34.61,5.75 v30.8,5.75
  Route15 0.3: U$1.P$Y2 21.91,16.24 21.91,13.37 23.18,12.1 24.45,13.37 v25.72,13.65
  Bottom 0.3: v15.56,31.15 16.83,31.15 | 16.83,31.15 16.83,29.88 v16.74,29.79 | 16.83,31.15 v16.83,32.45 arc28 11.75,34 6.67,33.69 v2.86,29.88
  other vias: 21.7,16.45
  pour Route15: 0.35,-4.33 48.55,-4.33 51.04,-1.84 51.04,31.12 46.01,36.15 -2.14,36.15 -2.14,-1.84
3V3/2.4A
  Top 0.3: C12.1 26.75,21.75 U$1.P$A22
ALERT  (via drill 0.35)
  Top 0.15: v7.94,31.15 7.65,31.43 U3.5 | v28.87,18.32 28.58,18.32 U$1.P$J24
  Route2 0.15: v28.87,18.32 30.01,17.18 30.8,17.18 34.61,20.99 34.61,23.53 30.8,27.34 10.46,27.34 9.2,28.6 7.94,29.88 v7.94,31.15
D+  (via drill 0.35)
  Top 0.15: U$1.P$AD6 22.7,13.85 v24.45,12.1 | v33.34,22.26 33.34,26.17 D3.4
  Bottom 0.15: v24.45,12.1 26.99,12.1 32.07,17.18 32.07,20.99 v33.34,22.26
D-  (via drill 0.35)
  Top 0.15: U$1.P$AD4 22.2,13.08 24.45,10.83 25.1,10.83 v25.72,11.45 | v33.47,20.99 35.88,23.53 35.88,27.34 34.61,28.61 33.44,28.61 D3.6
  Bottom 0.15: v25.72,11.45 28.26,10.83 33.47,15.91 v33.47,20.99
DEC1
  Top 0.15: C5.1 U$1.P$C1
DEC3
  Top 0.15: U$1.P$D23 27.75,20.9 C11.1
DEC4_6  (via drill 0.35)
  Top 0.15: U$1.P$E24 27.78,20.2 v28.25,20.43 28.61,20.43 C10.1 | U$1.P$B5 21.55,22.1 21.55,22.26 | 21.55,22.26 C15.1 21.11,23.15 L3.2 21.3,24.6 v22.05,24.6 | C16.1 21.8,22.52 21.55,22.26
  Bottom 0.15: v22.05,24.6 28.26,24.8 30.8,22.26 30.8,20.99 29.53,19.72 v28.25,20.43
DN  (via drill 0.35)
  Top 0.15: D3.1 30.62,29.7 v30.8,29.88 | v25.72,31.15 25.2,30.63 J4.B7 25.23,28.88 arc-45 25.32,28.67 25.32,27.85 arc-45 25.11,27.6 24.45,27.5 24.29,27.5 arc-45 24.2,27.71 J4.A7
  Route2 0.15: v30.8,29.88 29.53,31.15 v25.72,31.15
DP  (via drill 0.35)
  Top 0.15: D3.3 31.12,26.39 32.07,27.34 32.07,29.88 v30.8,31.15 | J4.A6 24.7,30.9 v24.45,31.15 23.79,30.49 arc45 23.7,30.28 J4.B6
  Route2 0.15: v30.8,31.15 29.53,32.42 25.72,32.42 v24.45,31.15
EPD_3V3  (via drill 0.35)
  Top 0.3: EPD_C5.2 12.04,15.76 J1.16 J1.15 9.56,16.26 v9.21,15.91 | L5.2 3.11,7.8 C1-EP-DR.1 2.62,8.29 v1.59,8.29 | Q1.3 v29.53,13.37
  Route2 0.3: v1.59,8.29 6.67,8.29 7.94,7.02 10.48,7.02 11.75,8.29 11.75,13.37 v9.21,15.91
  Route15 0.3: v9.21,15.91 14.29,15.91 18.1,12.1 18.1,8.29 19.37,7.02 25.72,8.29 28.02,10.59 28.26,10.83 29.53,12.1 v29.53,13.37
EPD_BUSY  (via drill 0.35)
  Top 0.15: J1.9 v11.75,19.26 | v24.05,14.64 24.2,14.79 U$1.P$AD12
  Bottom 0.15: v24.05,14.64 16.37,14.64 v11.75,19.26
EPD_CS  (via drill 0.2, 0.35)
  Top 0.15: J1.12 v9.79,17.76
  Bottom 0.15: U$1.P$K2 15.06,18.95 11.75,22.26 10.48,22.26 7.94,19.72 7.94,18.45 8.63,17.76 v9.79,17.76
  other vias: 21.7,18.95
EPD_DC  (via drill 0.35)
  Top 0.15: J1.11 v11.56,17.95 | v23.45,13.85 23.6,14.95 U$1.P$AD10
  Bottom 0.15: v11.56,17.95 16.14,13.37 22.97,13.37 v23.45,13.85
EPD_RST  (via drill 0.2, 0.35)
  Top 0.15: J1.10 v9.52,18.76
  Bottom 0.15: v9.52,18.76 9.52,20.03 10.48,20.99 11.75,20.99 17.04,15.7 U$1.P$AC11
  other vias: 23.95,15.7
GDR  (via drill 0.35)
  Top 0.3: J1.2 9.98,22.76 v9.21,23.53 | R2_EP_DR.2 8.93,8.57 v8.65,8.29 8.41,8.05 Q3.1
  Route2 0.3: v9.21,23.53 7.94,22.26 7.94,10.83 8.65,10.12 v8.65,8.29
GND  (via drill 0.2, 0.35)
  Top 0.235: C27.1 4.88,30.86
  Top 0.24: C42.2 27.65,27.81 | 35.41,5.13 C34.1 37.09,2 v37.15,1.94
  Top 0.25: 37.6,7.65 37.69,7.56 C32.1
  Top 0.258: IC1.D2 13.12,31.05
  Top 0.26: 24.46,4.65 C31.1 24.63,7.02 TP_BAT_GND.TP | 35.41,5.13 C30.1
  Top 0.267: C29.1 15.56,5.17
  Top 0.27: IC9.B1 IC9.C1
  Top 0.28: C24.2 10.58,25.94 10.48,24.8
  Top 0.3: C10.2 C3.2 29.4,17.95 C9.2 | C10.2 C11.2 | C15.2 22.88,23.45 arc-90 23.18,23.15 23.18,22.26 22.93,22 C16.2 U$1.P$B7 22.95,20.55 U$1.P$75 | C4.2 30.45,20.15 29.53,20.15 | 29.53,20.15 C10.2 | C22.2 29.31,20.99 C11.2 | C1.2 29.3,21.65 | 29.3,21.65 C11.2 | X1.2 31.45,22.88 | 31.45,22.88 30.81,22.24 | 30.81,22.24 30.22,21.65 29.3,21.65 | 31.45,22.88 30.23,24.11 X1.4 C2.2 C12.2 C13.2 25.72,23.53 TP_GND.TP | U$1.P$F23 U$1.P$78 | v30.05,19.55 29.53,20.15 | EPD_C6.2 13.34,15.28 EPD_C5.1 | EPD_C6.2 13.35,15 EPD_C7.2 13.32,13.92 EPD_C8.2 13.32,11.84 EPD_C10.2 | J1.MP2 8.66,10.33 EPD_C11.2 9.48,10.05 R2_EP_DR.1 | C1-EP-DR.2 4.04,9.72 4.78,10.15 7.21,10.15 J1.MP2 | EPD_C1.2 EPD_C2.2 | EPD_C10.2 EPD_C12.2 15.66,10.73 16.83,9.56 16.83,8.29 15.56,7.02 | R_TYPE_SEL.1 13.55,11.61 EPD_C10.2 | 15.56,7.02 D4.1 13.35,5.6 SW_DN.1 | 15.56,5.17 15.56,7.02 | 24.46,4.65 SW_ENT.1 | SW_UP.1 35.41,5.13 | J1.MP2 8.03,14.64 | 8.03,14.64 8.03,19.72 | 8.03,19.72 J1.MP1 8.78,24.9 9.21,24.8 | J1.17 9.33,15.26 EPD_C9.2 8.53,15.14 8.03,14.64 | 9.21,24.8 10.48,24.8 11.75,24.8 | 11.75,24.8 13.52,23.03 EPD_C2.2 | EPD_C1.2 13.52,17.18 | 13.52,17.18 13.52,15.91 | 13.52,15.91 13.52,15.19 EPD_C6.2 | J1.8 10.64,19.72 8.03,19.72 | EPD_C1.2 C17.1 19.93,19.74 C18.1 | J2.3 J2.5 40.96,8.61 v40.96,7.02 | C5.2 19.15,21.68 C14.2 17.46,23.4 15.09,23.4 EPD_C2.2 | J4.SH4 19.24,30.38 C19.2 17.58,30.9 IC3.8 IC3.9 | 13.12,31.05 14.32,29.05 | R9.1 13.76,29.6 14.32,29.05 | 14.32,29.05 14.52,28.84 | 14.52,28.84 14.76,28.61 v15.56,28.61 C33.2 | 20.13,29.37 19.37,28.61 v18.1,28.61 | 20.13,29.37 J4.SH4 | J4.A12_B1 20.59,28.91 20.13,29.37 | R2_USB.2 20.13,29.64 J4.SH4 | 28.71,29.43 28.2,28.91 J4.A1_B12 27.65,27.81 27.65,27.34
  Top 0.3: 28.71,29.43 J4.SH3 | R1_USB.1 26.29,30.45 26.99,31.15 28.26,31.15 28.71,30.7 28.71,29.43 | IC9.C2 IC9.C1 IC9.C3 9.03,28.65 9.03,28.43 v7.94,27.34 | U3.6 6.92,32.17 | 6.92,32.17 U3.9 6.67,32.87 arc90 6.37,33.17 U3.1 v3.61,33.17 | 6.42,31.67 U3.4 4.88,30.86 | 6.42,31.67 6.92,32.17 | C37.1 12.42,32.73 12.75,33.06 v12.75,33.23 | J4.SH2 20.08,33.69 v18.1,33.69 17.33,34.46 arc45 17.12,34.55 15.75,34.55 R3.1 | C25.2 6.42,31.52 6.42,31.67 | C38.1 13.29,27.61 | 14.52,28.84 13.29,27.61 | 13.29,27.61 13.29,26.34 11.75,24.8 | 9.21,24.8 v8.46,26.07 8.73,25.79 C23.1 | C24.2 10.98,27.25 C39.2 | C43.2 27.65,26.53 27.65,27.34 | D3.2 27.65,27.34 | 13.52,17.18 13.95,16.75 15.56,16.75 16.95,15.36 18.1,15.36 | C20.2 18.1,15.36 | C21.2 19.41,14.05 18.1,15.36 | 18.1,15.36 18.1,15.68 C6.2 | IC2.B1 37.15,5.75 35.88,7.02 35.88,7.35 arc-90 36.18,7.65 37.6,7.65 | IC2.B3 39.69,5.75 v40.96,4.48 | v30.8,4.48 28.26,4.48 TP_BAT_GND.TP | v31.66,15.05 C8.2 28.41,14.45 C7.2 | 30.81,22.24 31.1,21.96 v32.07,21.96 | 13.52,15.91 15.3,14.13 SJ1.1 | v38.42,8.05 37.69,7.56 | U$1.P$74 U$1.P$85
  Route2 0.3: v30.05,19.55 27.8,18.58 26.99,18.45 U$1.P$F23 | v12.75,33.23 14.29,34.45 16.07,34.45 16.83,33.69 v18.1,33.69 | v7.94,27.34 v8.46,26.07 | v18.1,28.61 v15.56,28.61 | v40.96,4.48 v30.8,4.48
  Route15 0.3: v31.66,15.05 32.07,15.46 v32.07,21.96
  Bottom 0.24: v37.15,1.94 39.69,1.94 40.96,3.21 v40.96,4.48
  Bottom 0.3: v40.96,4.48 v40.96,7.02 39.69,7.02 v38.42,8.05
  other vias: 27.2,19.95
  pour Bottom: 47.12,-0.87 47.12,33.52 47.08,33.52 47.06,33.54 43.07,37.52 -0.97,37.52 -2.72,35.77 -2.72,-3.32 -2.64,-3.24 -2.62,-3.22 44.77,-3.22
  pour Route2: -0.92,-3.06 46.01,-3.06 49.77,0.7 49.77,32.39 46.01,36.15 -2.14,36.15 -2.14,-1.84
  pour Top: 0.37,-1.75 48.45,-1.75 48.45,37.38 -0.82,37.38 -0.82,-0.55
HAPTIC_EN  (via drill 0.35)
  Top 0.15: U$1.P$U1 21.18,17.18 18.1,17.18 v17.09,16.33 | v37.15,7.02 IC2.A1
  Route2 0.15: v17.09,16.33 17.09,14.64 17.09,14.38 17.09,14.09 21.62,9.56 34.61,9.56 v37.15,7.02
IMU_INT1  (via drill 0.35)
  Top 0.15: v13.02,32.33 14.29,29.88 14.96,29.88 arc90 15.11,30.03 IC3.5 | U$1.P$N1 20.75,17.75 v16.45,17.75
  Route15 0.15: v13.02,32.33 9.21,28.61 9.21,24.8 11.75,22.26 11.75,20.99 14.99,17.75 v16.45,17.75
IMU_INT2  (via drill 0.2, 0.35)
  Top 0.15: v15.65,29.68 15.56,30.32 IC3.6
  Route15 0.15: U$1.P$P2 18.6,17.95 15.56,20.99 15.56,22.26 14.29,23.53 14.29,28.61 15.36,29.68 v15.65,29.68
  other vias: 21.7,17.95
LX1
  Top 0.15: IC9.B2 IC9.B3 9.21,27.34 8.69,26.89 L7.1
LX2
  Top 0.15: IC9.D2 IC9.D3 8.33,28.61 5.67,28.61 L7.2
MOSI  (via drill 0.2, 0.35)
  Top 0.15: v11.75,17.01 11.33,16.76 J1.14
  Route2 0.15: U$1.P$B13 15.77,21.2 v11.75,17.01
  other vias: 24.45,21.2
N$1
  Top 0.15: R9.2 13.02,30.38 IC1.D1
N$2
  Top 0.15: C9.1 28.04,18.2 U$1.P$N24
N$3
  Top 0.15: R4.2 8.81,30.62 IC9.D1
N$4
  Top 0.15: IC9.E1 8.41,30.95 9.21,31.75 R2.2
N$5
  Top 0.15: IC3.1 14.01,32.47 R3.2
N$6
  Top 0.15: C2-EP-DR.1 9.98,7.02 D4.2 12.23,7.02 D2.1
N$7  (via drill 0.35)
  Top 0.15: v29.93,18.45 30.35,18.45 L1.1 | U$1.P$H23 27.25,19.5 v28.25,19.54 28.7,19.54 C3.1
  Bottom 0.15: v28.25,19.54 v29.93,18.45
N$9
  Top 0.15: U$1.P$B24 27.7,21.29 C1.1 29,22.55 29.41,22.95 X1.1
N$10  (via drill 0.35)
  Top 0.15: U$1.P$A23 27.2,22.14 C2.1 28.3,22.59 v28.35,22.55 | v31.05,25.2 31.52,24.73 X1.3
  Route2 0.15: v28.35,22.55 28.26,24.8 28.66,25.2 v31.05,25.2
N$11
  Top 0.15: D5.2 11.73,5.25 C2-EP-DR.2 8.61,4.65 7.94,4.65 | L5.1 7.94,4.65 | Q3.3 7.94,5.51 7.94,4.65
N$12
  Top 0.15: R1_USB.2 25.74,28.96 J4.A5
N$13
  Top 0.15: U$1.P$A18 25.7,22.57 C13.1
N$14
  Top 0.15: L2.2 20.55,23.95 L3.1
N$15
  Top 0.15: L2.1 U$1.P$B3
N$16
  Top 0.15: R2_USB.1 22.7,30.63 J4.B5
N$17
  Top 0.148: 20.11,20.28 U$1.P$D2
  Top 0.15: 20.11,20.28 C17.2 X2.2
N$18
  Top 0.15: U$1.P$F2 20.76,20.07 20.65,19.77 20.46,19.2 C18.2 17.24,19.2 X2.1
N$19
  Top 0.15: C20.1 U$1.P$AC5
N$20
  Top 0.15: J1.4 12.32,21.76 EPD_C2.1
N$21  (via drill 0.35)
  Top 0.15: R_TYPE_SEL.2 14.68,12.61 SJ1.2 v14.29,13.37 | R1_EP_DR.1 v13.02,9.56
  Route2 0.15: v13.02,9.56 v14.29,13.37
N$22
  Top 0.15: IC2.A2 38.6,6.43 C32.2
N$23
  Top 0.15: J1.5 12.15,21.26 EPD_C1.1
N$24
  Top 0.15: J1.18 12.09,14.76 EPD_C6.1
N$25
  Top 0.15: J1.19 12.04,14.26 EPD_C7.1
N$26
  Top 0.15: J1.20 11.46,13.76 EPD_C8.1
N$28
  Top 0.15: J1.22 11.4,12.76 EPD_C10.1
N$30
  Top 0.15: EPD_C12.1 11.32,11.76 J1.24
OUT+
  Top 0.15: IC2.A3 40.46,6.25 42.23,4.48 TP_OP.TP
OUT-
  Top 0.15: TP_ON.TP 39.69,4.48 IC2.C3
P0.13  (via drill 0.18, 0.35)
  Top 0.15: SW_UP.2 32.72,4.29 R5.1 | R5.1 C30.2 | v30.8,10.83 32.07,9.56 32.07,8.29 32.72,7.64 R5.1
  Route2 0.15: U$1.P$AD8 22.65,14.65 22.91,12.97 26.12,12.97 28.26,10.83 v30.8,10.83
  other vias: 23.2,15.2
P0.14  (via drill 0.2, 0.35)
  Top 0.15: SW_ENT.2 R8.1 C31.2 22.99,6.83 v23.18,7.02 | v23.92,8.87 v22.7,10.45
  Route2 0.15: v23.18,7.02 23.18,8.29 v23.92,8.87 | v22.7,10.45 23.18,12.1 21.91,13.37 21.91,14.64 22.97,15.7 U$1.P$AC9
  other vias: 23.45,15.7
P1.01  (via drill 0.2, 0.35)
  Top 0.15: R_PWR_EPD.1 33.74,13.09 Q1.1 33.02,12.42 v32.07,13.37
  Route15 0.15: v32.07,13.37 28.99,16.45 U$1.P$Y23
  other vias: 27.2,16.45
P1.02  (via drill 0.35)
  Top 0.15: SW_DN.2 9.96,3.96 v8.95,3.45 | v15.56,3.21 14.98,3.79 R7.1 14.98,4.77 C29.2 14.56,5.75 v14.29,5.75 | U$1.P$W24 28.18,17.18 29.53,17.18 30.7,17.52 32.41,17.52 v33,17.75
  Route15 0.15: v33,17.75 33.34,17.41 33.34,10.83 32.07,9.56 29.53,9.56 28.26,8.29 28.26,7.02 26.99,5.75 v14.29,5.75
  Bottom 0.15: v8.95,3.45 10.48,4.48 14.29,4.48 v15.56,3.21
PMIC_INT  (via drill 0.2, 0.35)
  Top 0.15: v11.75,28.61 11.55,28.81 IC1.A1
  Route15 0.15: U$1.P$T2 17.83,17.45 14.29,20.99 14.29,22.26 11.88,24.8 v11.75,28.61
  other vias: 21.7,17.45
PREVGH  (via drill 0.35)
  Top 0.3: EPD_C9.1 v9.21,13.37 9.32,13.26 J1.21 | D5.1 11.03,8.05 v10.05,8.05
  Bottom 0.3: v10.05,8.05 v9.21,13.37
PREVGL
  Top 0.3: D2.2 9.5,11.33 EPD_C11.1 10.14,12.26 J1.23
RESE  (via drill 0.35)
  Top 0.3: v13.02,8.65 R1_EP_DR.2 | v9.21,22.26 J1.3 | Q3.2 7.73,9.35 v7.94,9.56
  Route15 0.3: v13.02,8.65 11.75,9.56 v7.94,9.56 7.94,20.99 v9.21,22.26
RESET  (via drill 0.2, 0.35)
  Top 0.15: J2.6 43.55,7.95 43.55,5.8 | TP_RESET.TP 43.55,5.8 | v44.77,7.02 43.55,5.8
  Route2 0.15: U$1.P$AC13 24.66,15.91 43.5,15.91 45.44,13.65 45.44,7.69 v44.77,7.02
  other vias: 24.45,15.7
RF
  Top 0.15: C22.1 C4.1 31.05,19.55 L1.2 38.52,19.35 ANT1.1
SCK  (via drill 0.35)
  Top 0.15: J1.13 10.6,17.18 v9.21,16.98 | v24.25,22.44 24.2,22.01 U$1.P$A12
  Route2 0.15: v24.25,22.44 10.48,22.26 8.65,19.72 8.65,17.25 arc90 v9.21,16.98
SCL  (via drill 0.2, 0.35)
  Top 0.15: v15.56,33.69 15.11,33.24 IC3.12 | IC1.B1 11.95,29.68 v13.05,28.61 | U3.7 8.96,32.67 v9.21,32.42 | R4.1 10.28,30.95 v10.48,31.15 | v34.61,10.83 TP_SCL.TP | TP_SCL.TP 36.81,5.25 IC2.C1 | R17.2 31.75,7.34 v30.8,8.29 | v33.34,8.29 33.61,8.29 TP_SCL.TP
  Route15 0.15: U$1.P$M2 19.37,18.45 18.1,19.72 18.1,24.8 20.64,27.34 | v13.05,28.61 13.02,31.15 14.29,32.42 | v15.56,33.69 14.29,32.42 | 14.29,32.42 15.56,32.42 20.64,27.34 | v34.61,10.83 34.61,23.53 30.8,27.34 20.64,27.34
  Bottom 0.15: v9.21,32.42 v10.48,31.15 13.02,28.61 v13.05,28.61 | v30.8,8.29 v33.34,8.29
  other vias: 21.7,18.45
SDA  (via drill 0.2, 0.35)
  Top 0.15: U$1.P$L1 20.95,18.45 19.39,18.25 15.76,18.25 v15.56,18.45 | v12.44,30.1 12.35,30.19 IC1.C1 | IC3.2 14.29,31.4 13.02,33.69 TP_SDA.TP | TP_SDA.TP 11.55,33.49 v10.48,32.42 10.08,32.02 R2.1 | U3.8 8.18,33.69 TP_SDA.TP | R18.2 21.04,9.16 v20.64,9.56
  Route2 0.15: v15.56,18.45 15.56,14.64 v20.64,9.56 20.64,7.02 23.18,4.48 26.99,4.48 29.53,7.02 34.61,7.02 35.88,5.75 IC2.B2
  Route15 0.15: v15.56,18.45 13.02,20.99 13.02,22.26 10.48,24.8 10.48,28.61 v12.44,30.1
  Bottom 0.15: v10.48,32.42 12.44,30.46 v12.44,30.1
  other vias: 38.42,5.75
SWDCLK
  Top 0.15: J2.4 42.23,11.15 43.18,11.5 44.17,11.5 44.77,12.1 arc127 TP_SWDCLK.TP 43.5,17.18 42.23,18.45 38.42,18.45 37.15,17.18 30.8,17.18 29.82,16.2 U$1.P$AA24
SWDIO
  Top 0.15: J2.2 42.23,14.64 42.23,15.91 TP_SWDIO.TP 38.42,17.18 37.15,15.91 27.91,15.91 U$1.P$AC24
SWO  (via drill 0.35)
  Top 0.15: TP_SWO.TP 28.26,8.73 v28.26,12.1 | v26.99,14.46 26.7,14.93 U$1.P$AD22
  Route2 0.15: v28.26,12.1 26.99,13.37 v26.99,14.46
VBAT  (via drill 0.35)
  Top 0.23: C27.2 4.38,31.38
  Top 0.28: IC1.C2 12.35,31.94
  Top 0.3: 12.35,31.94 C37.2 12.19,31.98 v11.65,32.32 | U3.2 U3.3 4.38,32.17 | v4.13,32.42 4.38,32.17 | 4.38,31.38 4.38,32.17 | 4.38,32.17 3.49,31.28 TP_VBAT.TP
  Route2 0.3: v11.65,32.32 10.48,33.69 5.4,33.69 v4.13,32.42
VBUS  (via drill 0.35)
  Top 0.15: IC1.A2 11.2,30.75 11.27,28.04 12.02,27.06 C38.2 11.75,26.36 v11.25,25.55
  Top 0.24: C42.1 25.78,27.34
  Top 0.28: 25.78,27.34 26.85,28.47
  Top 0.3: U$1.P$AD2 C21.1 21.14,12.87 v21.91,12.1 | C43.1 26.49,26.57 25.78,27.34 25.04,26.66 v21.95,26.66 21.95,28.81 J4.A9_B4 | 26.85,28.47 J4.A4_B9 | D3.5 v34.61,27.34
  Bottom 0.15: v11.25,25.55 20.64,26.07 v21.95,26.66
  Bottom 0.3: v21.91,12.1 24.45,9.56 30.8,9.56 34.61,13.37 34.61,23.53 33.34,24.8 | 33.34,24.8 31.48,26.66 v21.95,26.66 | v34.61,27.34 34.61,26.07 33.34,24.8
VREG
  Top 0.15: IC1.B2 11.95,31.15 11.67,31.42 11.52,31.42 10.15,30.28 IC9.A1 | 8.45,26.55 C23.2
  Top 0.2: 7.64,25.77 arc90 7.94,26.07 arc-90 8.45,26.55
  Top 0.235: 9.67,27.8 C39.1
  Top 0.27: IC9.A1 IC9.A2
  Top 0.3: IC9.A2 IC9.A3 10.1,29.39 C39.1 | C23.2 9.67,27.03 | 9.67,27.03 9.67,27.8 | C24.1 9.98,26.72 9.67,27.03 | TP_VREG.TP 2.86,26.37 | 3.16,25.77 arc-90 2.86,26.37 | 2.86,26.37 2.86,26.07 arc90 3.16,25.77 | 3.16,25.77 7.64,25.77
(copper drawn outside any net)
  shapes: Bottom area x1, Route15 area x1, Route2 area x1, Top area x1

## Text on the board
Top: GND | GND | GND | GND | GND | GND